# Altium PCB ElnC_PeakDetector_BO6.PcbDoc
Units mm, origin at the board's own origin, x right, y up, seen from the top; angles counter-clockwise.
Board outline 63.2 x 44.5 mm, 2 copper layers (Top Layer, Bottom Layer), stack 1.57 mm thick; 15 components, 11 nets, 44 pads, 2 vias.
Unrouted connection lines stored in the file: 1.
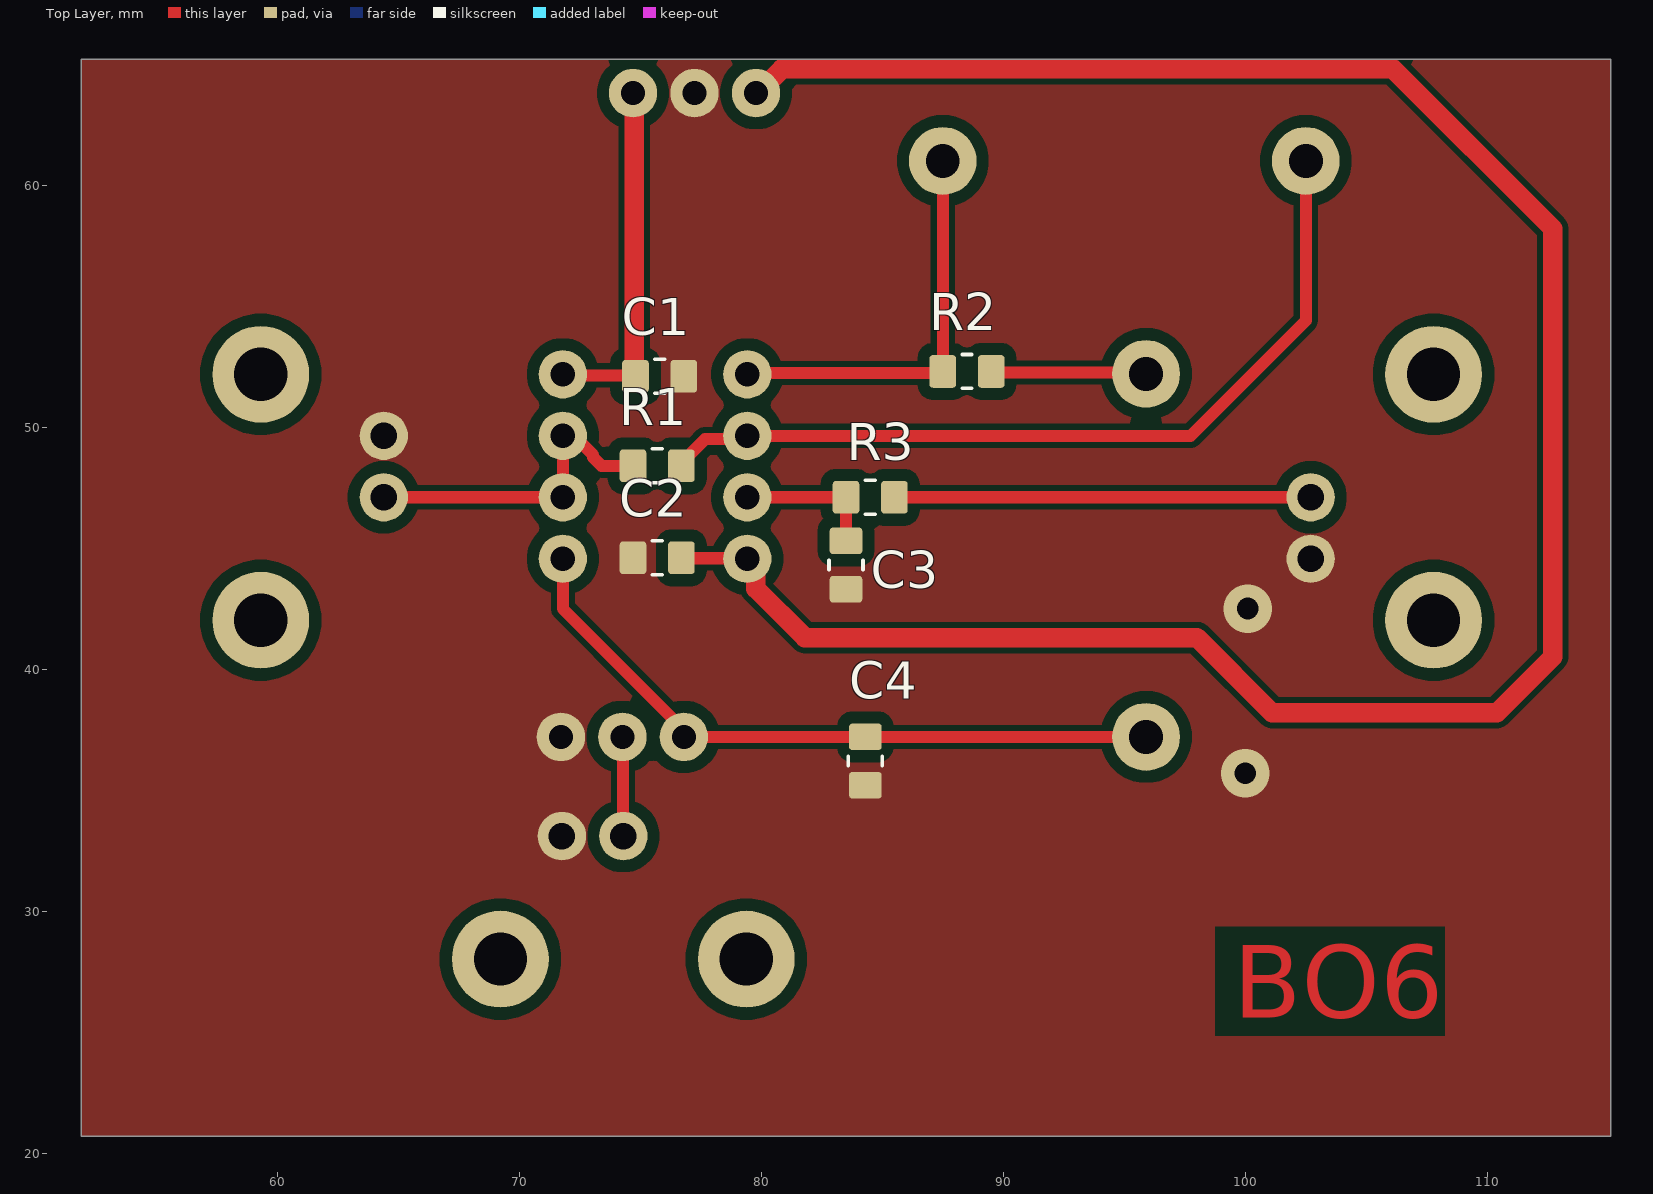
[diagram p0: Top Layer view]
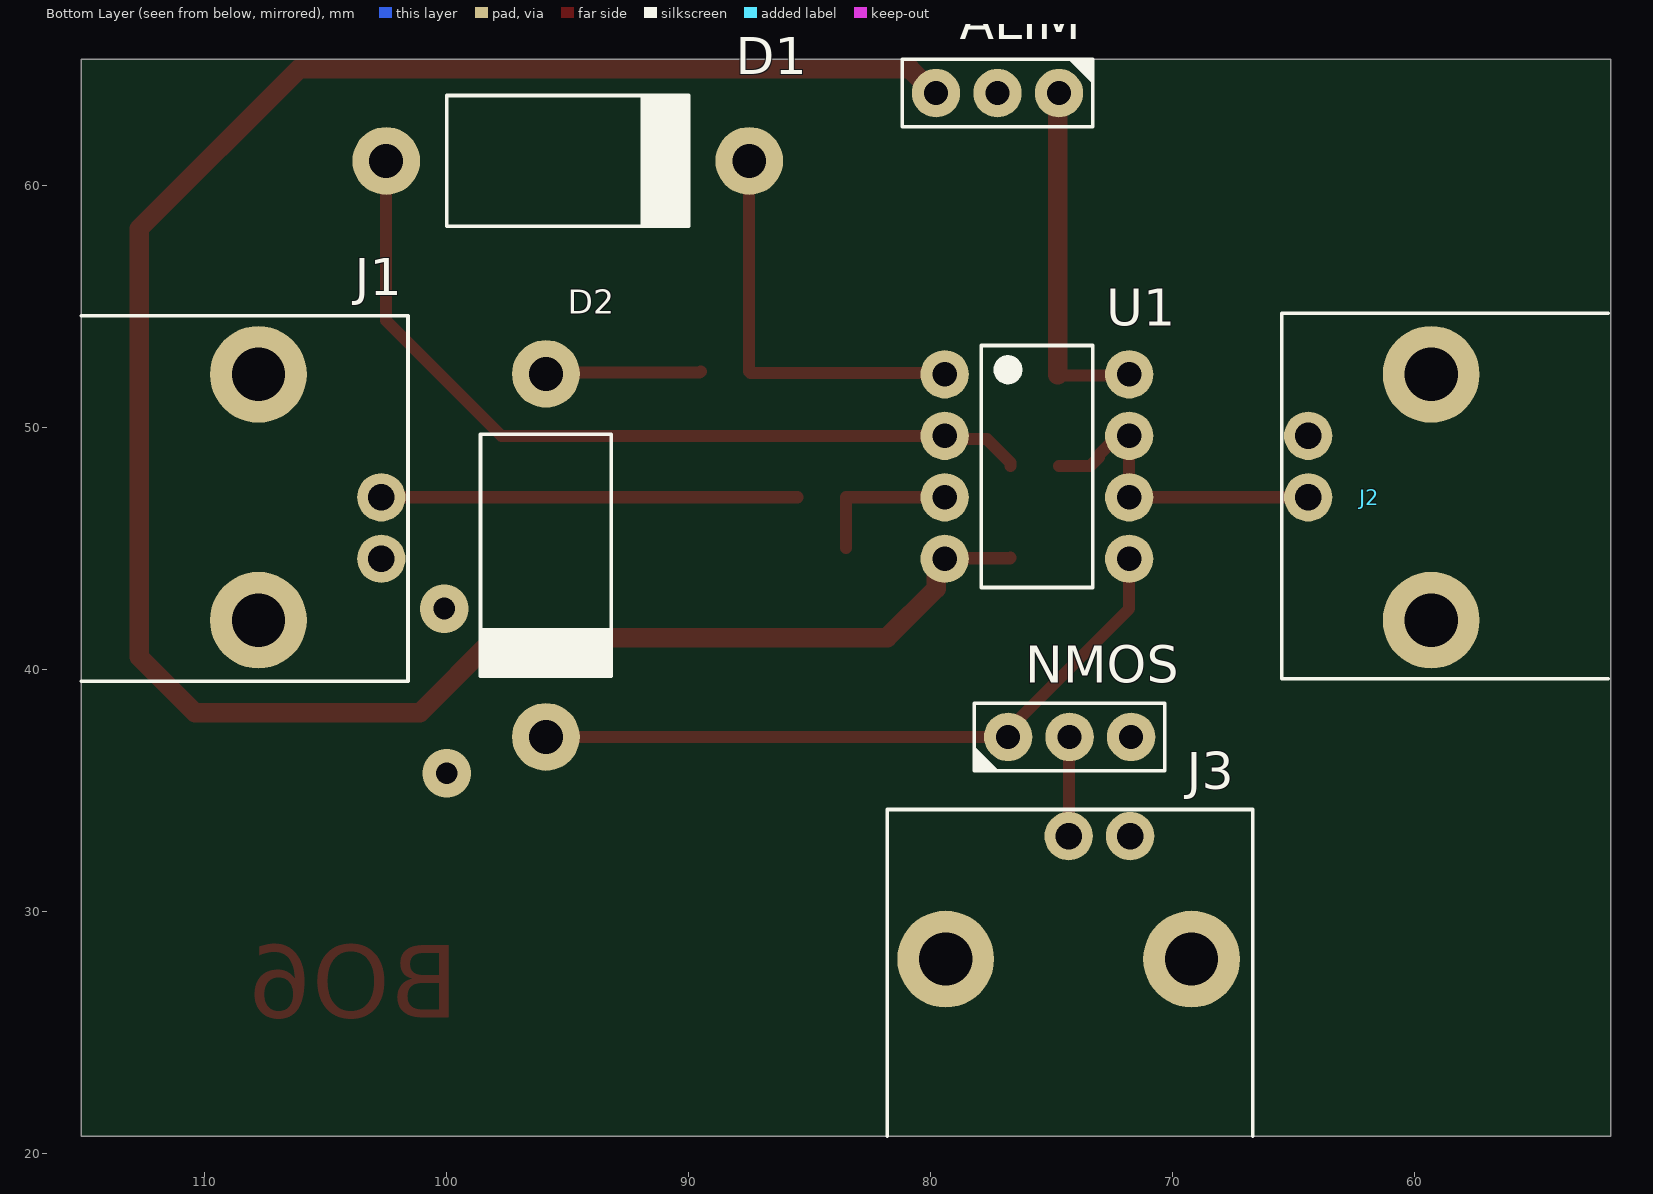
[diagram p1: Bottom Layer view, seen from below]

## Layer stack, top to bottom
Top Layer: signal copper 0.035
Dielectric 1: core 1.5, FR-4, Dk 4.2
Bottom Layer: signal copper 0.035

## Board outline
51.9,20.7 51.9,65.2 115.1,65.2 115.1,20.7

## Design rules (kind name [scope] priority, off if disabled: settings)
AcuteAngle [All] p1: minimum=9.00000000000000E+0001 checktracksonly=TRUE
AssemblyTestPointUsage [All] p1 off:
AssemblyTestpoint [All] p1 off: testpointundercomponent=TRUE minsize=1.016 maxsize=2.54 preferedsize=1.524 minholesize=0 maxholesize=1.016 preferedholesize=0.813 testpointgrid=0.025 usegrid=TRUE gridtolerance=0 allowsidetop=TRUE allowsidebottom=TRUE
BoardOutlineClearance [All] p1 off: gap=0.25 ignorepadtopadclearanceinfootprint=FALSE
Clearance [All] p1: gap=0.25 ignorepadtopadclearanceinfootprint=FALSE except(0: Arc-Hole Track-Hole SMDPad-Hole THPad-Hole Via-Hole Fill-Hole Poly-Hole Region-Hole Text-Hole; 0.5: SMDPad-Fill SMDPad-Poly SMDPad-Region THPad-Fill THPad-Poly THPad-Region Via-Fill Via-Poly Via-Region)
ComponentClearance [All] p1 off: gap=0.25 collisioncheckmode=3 verticalgap=0.25 showdistances=FALSE
DiffPairsRouting [All] p1 off: maxlimit=0.254 minlimit=0.254 mostfreqgap=0.254 toplayer_minwidth=0.381 toplayer_maxwidth=0.381 toplayer_prefwidth=0.381 bottomlayer_minwidth=0.381 bottomlayer_maxwidth=0.381 bottomlayer_prefwidth=0.381 maxuncoupledlength=12.7
FabricationTestPointUsage [All] p1 off: valid=0 allowmultiple=FALSE
FabricationTestpoint [All] p1 off: side=3 testpointundercomponent=TRUE minsize=1.016 maxsize=2.54 preferedsize=1.524 minholesize=0 maxholesize=1.016 preferedholesize=0.813 testpointgrid=0.025 allowsidetop=TRUE allowsidebottom=TRUE usegrid=TRUE gridtolerance=0
FanoutControl Fanout_BGA [IsBGA] p1 off: bgadir=Out bgaviamode=Centered fanoutstyle=Auto fanoutdirection=Alternating viagrid=0.025 // Fanout_BGA (Default Rule)
FanoutControl Fanout_LCC [IsLCC] p2 off: bgadir=Out bgaviamode=Centered fanoutstyle=Auto fanoutdirection=Alternating viagrid=0.025 // Fanout_LCC (Default Rule)
FanoutControl Fanout_SOIC [IsSOIC] p3 off: bgadir=Out bgaviamode=Centered fanoutstyle=Auto fanoutdirection=Alternating viagrid=0.025 // Fanout_SOIC (Default Rule)
FanoutControl Fanout_Small [(CompPinCount < 5)] p4 off: bgadir=Out bgaviamode=Centered fanoutstyle=Auto fanoutdirection=OutThenIn viagrid=0.025 // Fanout_Small (Default Rule)
FanoutControl Fanout_Default [All] p5 off: bgadir=Out bgaviamode=Centered fanoutstyle=Auto fanoutdirection=Alternating viagrid=0.025 // Fanout_Default (Default Rule)
Height [All] p1 off: minheight=0 maxheight=25.4 prefheight=12.7
HoleSize [All] p1 off: absolutevalues=TRUE maxlimit=3 minlimit=0.15 maxpercent=80.000 minpercent=20.000
HoleToHoleClearance [All] p1 off: gap=0.25 allowstackedmicrovias=TRUE
LayerPairs [All] p1 off: enforce=TRUE
MinimumAnnularRing [All] p1 off: minimumring=0.35
MinimumSolderMaskSliver [All] p1 off: minsoldermaskwidth=0
PasteMaskExpansion [All] p1 off: expansion=0
PlaneClearance [All] p1: clearance=0.25
PlaneConnect [All] p1 off: planeconnectstyle=Relief reliefexpansion=0.5 reliefentries=4 reliefconductorwidth=0.25 reliefairgap=0.25
PolygonConnect [All] p1: connectstyle=Direct reliefconductorwidth=0.25 reliefentries=4 polygonreliefangle="90 Angle" airgapwidth=0.25
RoutingCorners [All] p1 off: cornerstyle=45-Degree minsetback=2.5 maxsetback=2.5
RoutingLayers [All] p1 off: top layer_v5=TRUE bottom layer_v5=TRUE
RoutingPriority [All] p1 off: routingpriority=0
RoutingTopology [All] p1 off: topology=Shortest
RoutingVias [All] p1: holewidth=0.9 width=2 viastyle="Through Hole" minholewidth=0.9 minwidth=1.5 maxholewidth=0.9 maxwidth=2.5
SilkToBoardRegionClearance [All] p1 off:
SilkToSilkClearance [All] p1 off: silktosilkclearance=0
SilkToSolderMaskClearance [IsPad] p1 off: minsilkscreentomaskgap=0 clearancetoexposedcopper=TRUE
SolderMaskExpansion [All] p1 off: expansion=0 istentingtop=FALSE
Width [All] p1: maxlimit=4 minlimit=0.25 preferedwidth=0.5
4 further rules are at their usual default settings.

## Components (designator, comment, footprint, x,y, rotation, side; value= is the part's Value field where it differs from the comment)
ALIM "*" "PinHeader1x3 P2.54" 77.24,63.8 r0 bottom
C1 "1u" "CAPACITOR 2012 REFLOW" 75.8,52.1 r0 top
C2 "1u" "CAPACITOR 2012 REFLOW" 75.7,44.6 r180 top
C3 "33n" "CAPACITOR 2012 REFLOW" 83.5,44.3 r270 top
C4 "4.7u" "CAPACITOR 2012 REFLOW" 84.3,36.2 r270 top
D1 "*" "DIODE D5.4 L10.0 P15.0" 95,61 r0 bottom
D2 "*" "DIODE D5.4 L10.0 P15.0" 95.9,44.7 r90 bottom
J1 "*" "BNC TH RIGHT ANGLE TE CONNECTIVITY 1-1337543-0" 102.7,47.1 r180 bottom
J2 "*" "BNC TH RIGHT ANGLE TE CONNECTIVITY 1-1337543-0" 64.4,47.1 r0 bottom
J3 "*" "BNC TH RIGHT ANGLE TE CONNECTIVITY 1-1337543-0" 74.3,33.1 r90 bottom
NMOS "*" "PinHeader1x3 P2.54" 74.26,37.2 r180 bottom
R1 "10k" "RESISTOR 2012 REFLOW" 75.7,48.4 r0 top
R2 "100" "RESISTOR 2012 REFLOW" 88.5,52.3 r180 top
R3 "10k" "RESISTOR 2012 REFLOW" 84.5,47.1 r0 top
U1 "*" "DIP8 P2.54 W7.62 H5.0" 75.61,48.37 r180 bottom

## Footprints (in the part's own frame and the unit in brackets; to place one, negate y for a bottom-side part, rotate by r counter-clockwise, add the part's x,y. Pads: shape width x height; smd on the part's side, far side on the other; paste and mask are expansions set on the pad)
"BNC TH RIGHT ANGLE TE CONNECTIVITY 1-1337543-0" [mm] "BNC TH RIGHT ANGLE TE CONNECTIVITY 1-1337543-0"
  round 4 hole 2.2 unplated: 0(-5.08,-5.08) 0(-5.08,5.08)
  round 2 hole 1.1: 1(0,0) 2(0,-2.54)
  silkscreen extent -12.4,-7.6 1.1,7.5, body extent -33.4,-7.4 0.8,7.3, height 15.8
"CAPACITOR 2012 REFLOW" [mm] "Capacitor SMD 2.0x1.2mm (0805-imperial)"
  rrect25% 1.1x1.35 smd: 1(-1,0) 2(1,0)
  silkscreen extent -0.2,-0.7 0.2,0.7, body extent -1,-0.6 1,0.6, height 1
"DIODE D5.4 L10.0 P15.0" [mm] "Diode Body D5.4 L7.5  P12.5"
  round 2.8 hole 1.4: 1(-7.5,0) 2(7.5,0)
  silkscreen extent -5,-2.7 5,2.7, body extent -8.1,-2.8 8.1,2.7, height 5.5
"DIP8 P2.54 W7.62 H5.0" [mm] "8-Pin Dual in Line Integrated Circuit 2.54 Pitch, 7.62 Width, Case 10x6mm"
  round 2 hole 1: 1(-3.81,3.81) 2(-3.81,1.27) 3(-3.81,-1.27) 4(-3.81,-3.81) 5(3.81,-3.81) 6(3.81,-1.27) 7(3.81,1.27) 8(3.81,3.81)
  silkscreen extent -2.3,-5 2.3,5, body extent -4.11,-5.07 4.11,5.08, height 3.85
"PinHeader1x3 P2.54" [mm] "Plug connector"
  round 2 hole 1: 1(-2.54,0) 2(0,0) 3(2.54,0)
  silkscreen extent -3.94,-1.4 3.94,1.4, body extent -3.88,-1.27 3.74,1.27, height 8.5
"RESISTOR 2012 REFLOW" [mm] "Resistor SMD 2.0x1.2mm (0805-imperial)"
  rrect25% 1.1x1.35 smd: 1(-1,0) 2(1,0)
  silkscreen extent -0.2,-0.7 0.2,0.7, body extent -1,-0.63 1,0.63, height 0.45

## Part data
ALIM NMOS: library part PinHeader1x3, "Plug connector"
C1 C2 C3 C4: library part Capacitor, "Capacitor"
D1 D2: library part DIODE, "Diode generic 2 leads"
J1 J2 J3: library part BNC, "BNC"
R1 R2 R3: library part Resistor, "Resistor"
U1: library part "OPA DUAL", "Generic dual OPA 8 pins"

## Via types
v1: diameter 2, hole 0.9, Top Layer to Bottom Layer, 2 vias

## Nets (pads, with @x,y where several pads share a name; then routed paths per layer and width w, separated by ;. In a path a pad name is that pad's centre, name@x,y a point inside that pad or via, vN(x,y) a via of type N, cw(c..) or ccw(c..) an arc to the next point about the centre after c; other vN are vias at no path point)
GATE: J3.1 NMOS.2 | length 4.3
  Top Layer w0.5: J3.1@74.1,33.2 J3.1@74.15,33.25 ; NMOS.2@74.15,37.55 NMOS.2@74.2,37.6 ; NMOS.2 74.28,37.18 74.28,33.12 J3.1
GND: ALIM.2 C1.2 C2.2 C3.2 C4.2 J1.2 J2.2 J3.2 NMOS.3
  other v1: 100,35.7 100.1,42.5
IN: J1.1 R3.2 | length 17.2
  Top Layer w0.5: R3.2 J1.1
NetC3_1: C3.1 R3.1 U1.3 | length 6.2
  Top Layer w0.5: U1.3 R3.1 C3.1@83.5,45
NetC4_1: C4.1 D2.1 NMOS.1 U1.5 | length 28.6
  Top Layer w0.5: U1.5@71.78,44.54 U1.5 71.8,42.5 76.8,37.5 NMOS.1 C4.1 D2.1
NetD1_1: D1.1 R2.2 U1.1 | length 16.8
  Top Layer w0.5: U1.1 79.48,52.24 87.44,52.24 R2.2 D1.1
NetD1_2: D1.2 R1.2 U1.2 | length 35
  Top Layer w0.5: R1.2 76.7,48.525 77.681,49.506 79.286,49.506 U1.2 97.74,49.64 102.5,54.4 D1.2
NetD2_2: D2.2 R2.1 | length 6.4
  Top Layer w0.5: R2.1 89.55,52.25 95.85,52.25 D2.2
OUT: J2.1 R1.1 U1.6 U1.7 | length 13.4
  Top Layer w0.5: J2.1 U1.6 U1.7 72.261,49.64 73.046,48.854 73.046,48.754 73.4,48.4 R1.1
VCC: ALIM.1 C1.1 U1.8 | length 14.7
  Top Layer w0.5: U1.8 71.84,52.14 74.76,52.14 C1.1@74.75,52.15 ; ALIM.1 ALIM.1@74.75,63.75
  Top Layer w0.8: C1.1@74.75,52.15 ALIM.1@74.75,63.75
VEE: ALIM.3 C2.1 U1.4 | length 94
  Top Layer w0.5: C2.1 76.72,44.58 79.4,44.58 U1.4
  Top Layer w0.8: U1.4 79.593,44.56 79.778,44.375 79.778,43.322 81.8,41.3 98,41.3 101.1,38.2 110.4,38.2 112.7,40.5 112.7,58.2 106.1,64.8 80.849,64.8 79.849,63.8 ALIM.3
pads on no net: J1.0 J2.0 J3.0

## Polygon pours and split planes (outlines as drawn)
GND on Top Layer "GND_L01_P000" (solid, pour order 0): 51.9,65.2 51.9,20.7 115.1,20.7 115.1,65.2

## Other copper
Top Layer:
  text "BO6" at 99.5,25.6 h3

## Silkscreen, mask and mechanical layers (free items; w line width, h text height)
Mechanical 1:
  the board outline again, w0.15